# Altium PCB recall_ble_mod_v0_1.PcbDoc
Units mil, origin at the board's own origin, x right, y up, seen from the top; angles counter-clockwise.
Board outline 1166 x 940 mil, 2 copper layers (Component Side, Bottom Layer), stack 12.8 mil thick; 15 components, 13 nets, 89 pads, 5 vias.
Unrouted connection lines stored in the file: 1.
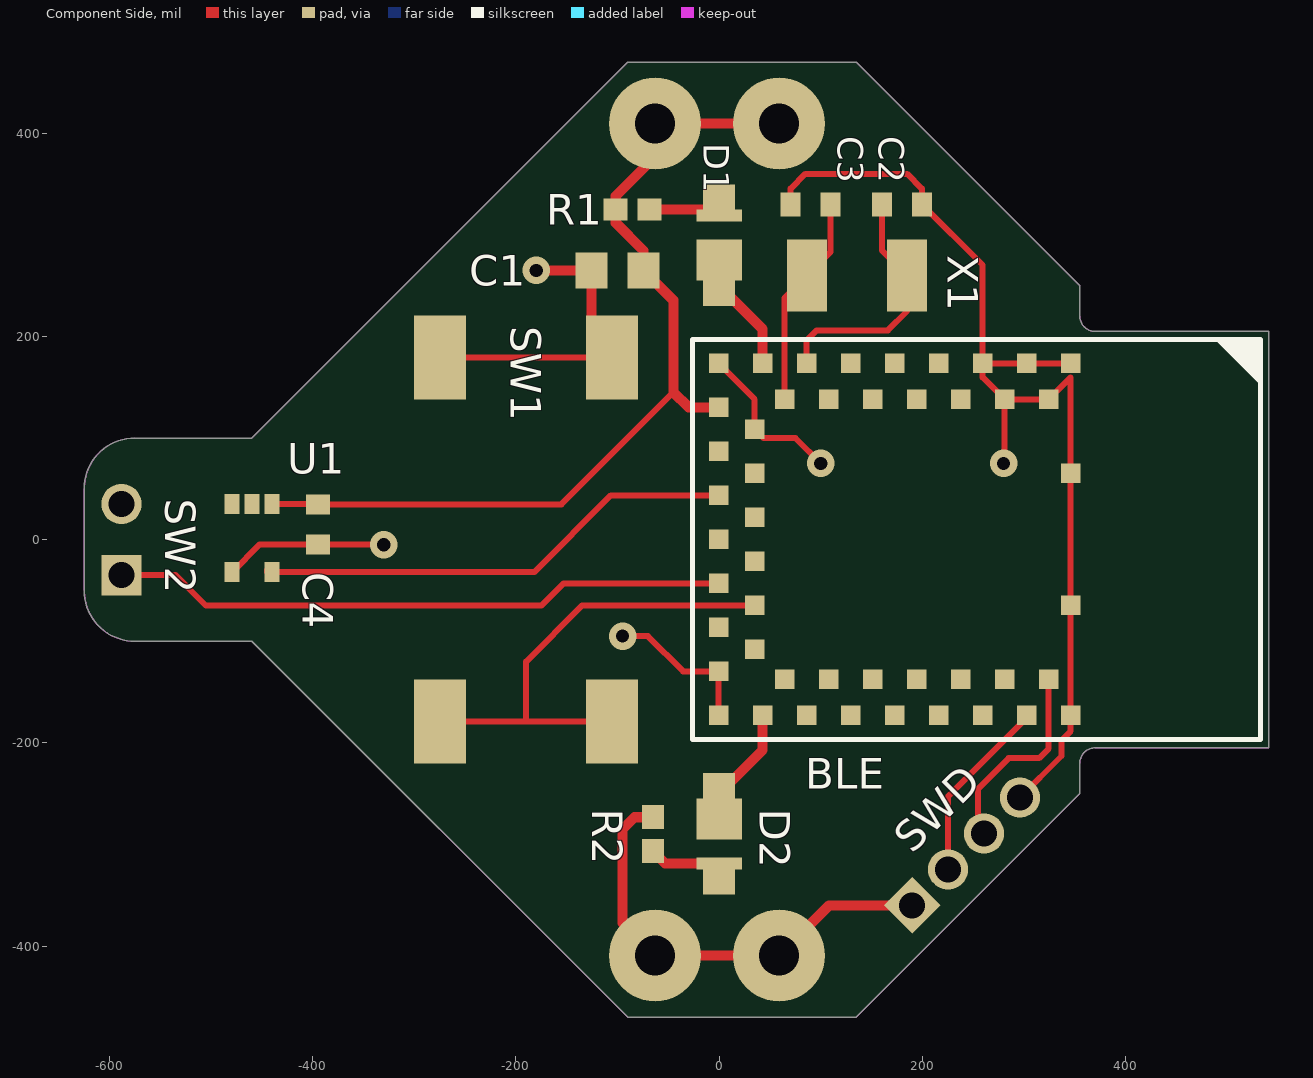
[diagram p0: Component Side view]
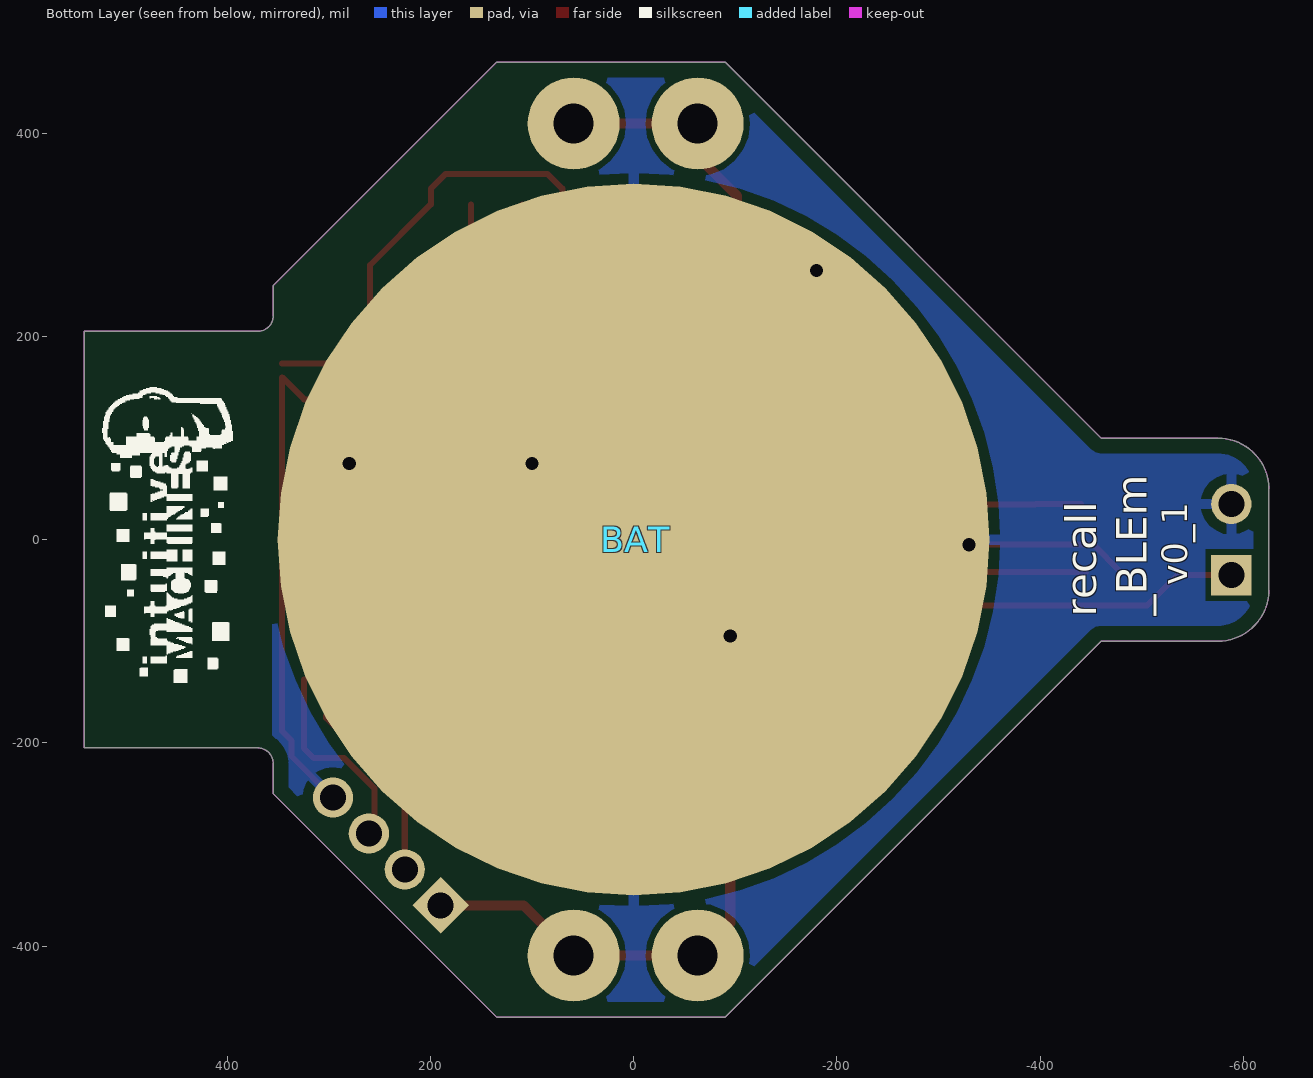
[diagram p1: Bottom Layer view, seen from below]
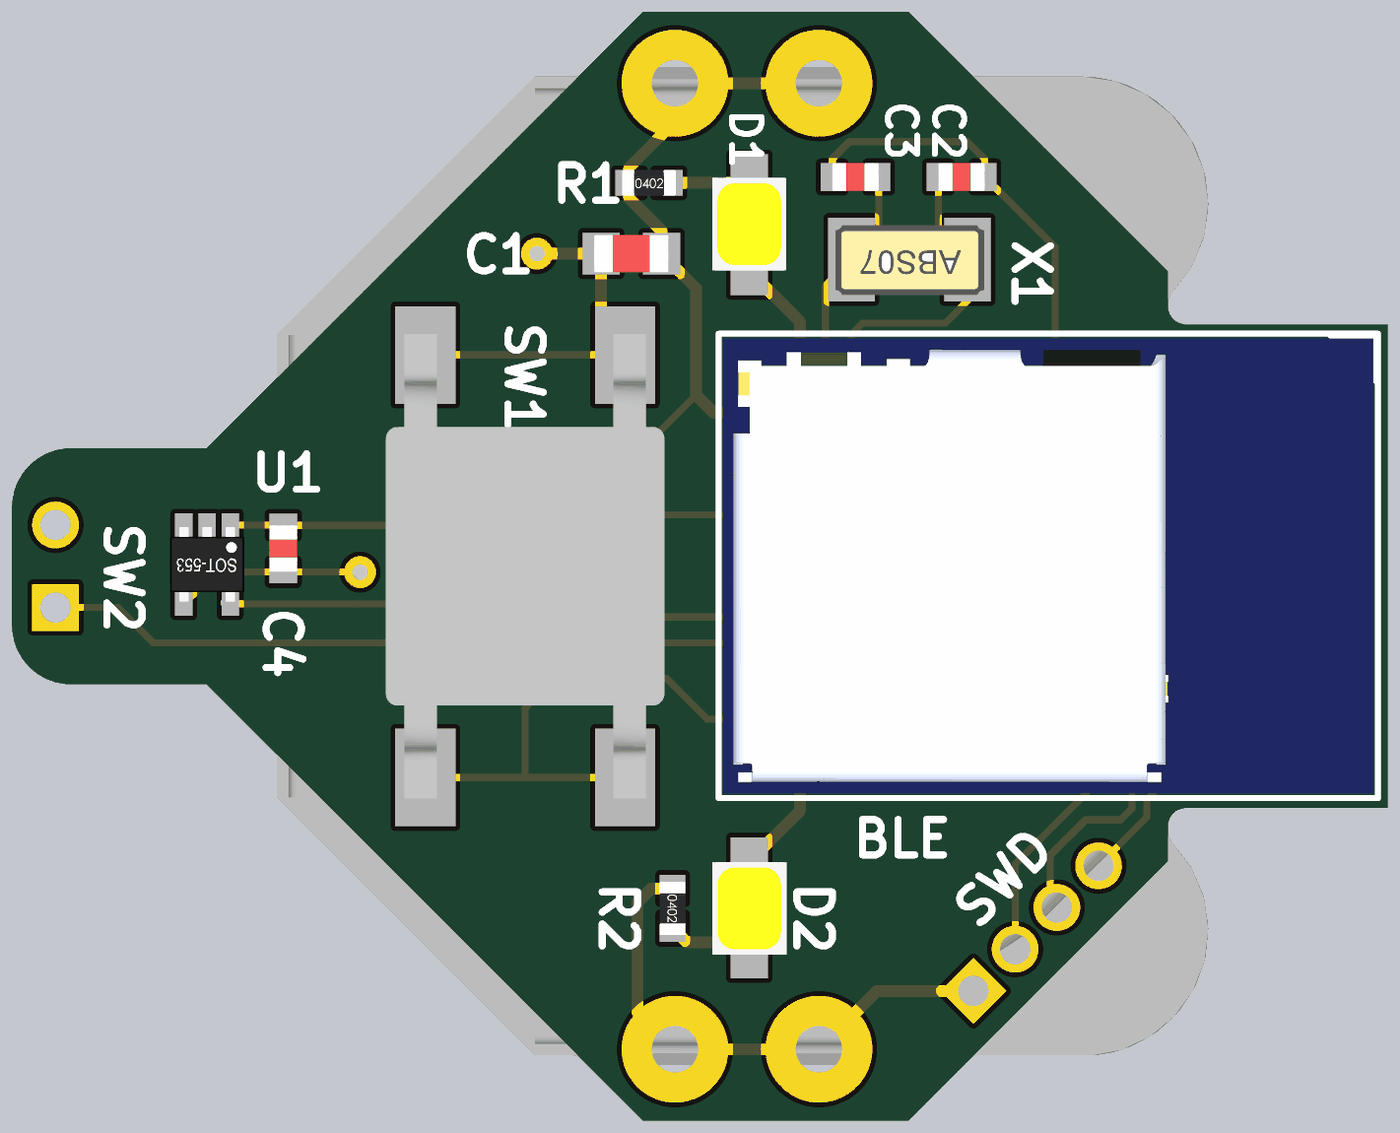
[diagram p2: 3D render of the assembled board from above, using the file's embedded part models]

## Layer stack, top to bottom
Top Solder: solder mask 0.4, Solder Resist, Dk 3.5
Component Side: signal copper 1.4
Dielectric 1: core 10, FR-4, Dk 4.2
Bottom Layer: signal copper 1.4
Solder Side: solder mask 0.4, Solder Resist, Dk 3.5

## Board outline
-575,-100 cw(c-575,-50) -625,-50 -625,50 cw(c-575,50) -575,100 -460,100 -90,470 135,470 355,250 355,220 ccw(c370,220) 370,205 541,205 541,-205 370,-205 ccw(c370,-220) 355,-220 355,-250 135,-470 -90,-470 -460,-100

## Design rules (kind name [scope] priority, off if disabled: settings)
BoardOutlineClearance [All] p1: gap=15
Clearance [All] p1: gap=6
HoleSize [All] p1: absolutevalues=TRUE maxlimit=100 minlimit=13 maxpercent=80.000 minpercent=20.000
HoleToHoleClearance [All] p1: gap=6 allowstackedmicrovias=TRUE
MinimumAnnularRing [All] p1: minimumring=7
MinimumSolderMaskSliver [All] p1: minsoldermaskwidth=0
PolygonConnect [All] p1: connectstyle=Relief reliefconductorwidth=10 reliefentries=4 polygonreliefangle="90 Angle" airgapwidth=10
RoomDefinition recall_ble_mod_v0_1 [InComponentClass('recall_ble_mod_v0_1')] p1: confinementstyle=ConfineIn formatcopy=TRUE lockcomponents=FALSE outline -3105,-2070 3685,-2070 3685,2625 -3105,2625
RoutingVias [All] p1: holewidth=13 width=27 viastyle="Through Hole" minholewidth=13 minwidth=27 maxholewidth=28 maxwidth=50
SilkToSilkClearance [All] p1: silktosilkclearance=6
SilkToSolderMaskClearance [IsPad] p1: minsilkscreentomaskgap=6 clearancetoexposedcopper=TRUE
SolderMaskExpansion [All] p1: expansion=4
Width [All] p1: maxlimit=50 minlimit=6 preferedwidth=6
25 further rules are at their usual default settings.

## Components (designator, comment, footprint, x,y, rotation, side; value= is the part's Value field where it differs from the comment)
BAT "CR2032" BAT-HLD-001-THM 0,0 r90 bottom
BLE "BMD-300" BMD-300 35,-108 r180 top locked
C1 "CAP" CAP_0603R -100,265 r0 top
C2 "CAP" CAP_0402R 180,330 r180 top
C3 "CAP" CAP_0402R 90,330 r0 top
C4 "CAP" CAP_0402R -395,15 r90 top
D1 "MP2016" MP2016_centered 0,290 r90 top
D2 "MP2016" MP2016_centered 0,-290 r270 top
R1 "RES" RES_0402 -85,325 r0 top
R2 "RES" RES_0402 -65,-290 r270 top
SW1 "4-1437565-1" 4-1437565-1 -190,0 r180 top
SW2 "DDS001" DDS001 -588.15,-35 r90 top
SWD "Header 4" HDR1X4_SWD 190,-360 r45 top
U1 "AH1892" sot-553 -440,35 r180 top
X1 "ABS07" ABS07 185,260 r180 top

## Footprints (in the part's own frame and the unit in brackets; to place one, negate y for a bottom-side part, rotate by r counter-clockwise, add the part's x,y. Pads: shape width x height; smd on the part's side, far side on the other; paste and mask are expansions set on the pad)
4-1437565-1 [mm] "TE Tactile Switch, 6mm x 6mm x 4mm"
  rect 1.3x2.1 smd: 1(-2.15,4.55) 1(2.15,4.55) 2(-2.15,-4.55) 2(2.15,-4.55)
  body extent -3,-5 3,5, height 5.05
ABS07 [mm] "ABS07-32.768KHZ-T"
  rect 1x1.8 smd: 1(0,0) 2(2.5,0)
  body extent -0.36,-0.74 2.84,0.76, height 0.89
BAT-HLD-001-THM [mm] "Battery holder for CR2032"
  round 2.3 hole 1: 1(-10.4,-1.6) 1(-10.4,1.5) 1(10.4,-1.6) 1(10.4,1.5)
  round 17.8 smd: 2(0,0)
  body extent -10.74,-10.17 10.74,9.88, height 3.96
BMD-300 [mm] "BMD-300, LGA, 47pin ,1.1mm Pitch, 14mm x 9.8mm"
  rect 0.49x0.49 smd: 1(-7.9,-7.15) 2(-7.35,-6.25) 3(-6.8,-7.15) 4(-6.25,-6.25) 5(-5.7,-7.15) 6(-5.15,-6.25) 7(-4.6,-7.15) 8(-4.05,-6.25) 9(-3.5,-7.15) 10(-2.95,-6.25) 11(-2.4,-7.15) 12(-1.85,-6.25) 13(-1.3,-7.15) 14(-0.75,-6.25) 15(-0.2,-7.15) 16(0.9,-7.15) 17(0.9,-6.05) 18(0,-5.5) 19(0.9,-4.95) 20(0,-4.4) 21(0.9,-3.85) 22(0,-3.3) 23(0.9,-2.75) 24(0,-2.2) 25(0.9,-1.65) 26(0,-1.1) 27(0.9,-0.55) 28(0,0) 29(0.9,0.55) 30(0.9,1.65) 31(-0.2,1.65) 32(-0.75,0.75) 33(-1.3,1.65) 34(-1.85,0.75) 35(-2.4,1.65) 36(-2.95,0.75) 37(-3.5,1.65) 38(-4.05,0.75) 39(-4.6,1.65) 40(-5.15,0.75) 41(-5.7,1.65) 42(-6.25,0.75) 43(-6.8,1.65) 44(-7.35,0.75) 45(-7.9,1.65) 46(-7.9,-1.1) 47(-7.9,-4.4)
  Multi-Layer pour cut-out: -8.15,-7.65 -8.15,2.15 -12.55,2.15 -12.55,-7.65
  silkscreen extent -12.65,-7.75 1.55,2.25, body extent -12.55,-7.65 1.45,2.15, height 1.89
CAP_0402R [mm] "Capacitor 0402 reflow soldering"
  rect 0.5x0.6 smd: 1(-0.5,0) 2(0.5,0)
  body extent -0.5,-0.3 0.5,0.3, height 0.2
CAP_0603R [mm] "capacitor 0603 reflow soldering"
  rect 0.8x0.9 smd: 1(-0.65,0) 2(0.65,0)
  body extent -0.8,-0.4 0.8,0.4, height 0.3
DDS001 [mm] "Micro Mini Thru-hole Detect Switches"
  rect 1.006x1.006 hole 0.65: 1(0,0)
  round 1.006 hole 0.65: 2(1.778,0)
HDR1X4_SWD [mm] "Connector; Header; 1x4Position"
  rect 1.006x1.006 hole 0.65: 1(0,0)
  round 1.006 hole 0.65: 2(1.27,0) 3(2.54,0) 4(3.81,0)
MP2016_centered [mm] "Luminus XNOVA LED"
  rect 0.3x1.14 smd: A(0.731,0)
  rect 0.65x0.8 smd: A(1.181,0) C(-1.204,0)
  rect 1.02x1.14 smd: C(-0.379,0)
  body extent -1,-0.8 1,0.8, height 0.55
RES_0402 [mm]
  rect 0.6x0.55 smd: 1(-0.425,0) 2(0.425,0)
  body extent -0.58,-0.28 0.57,0.27, height 0.41
sot-553 [mm]
  rect 0.375x0.5 smd: 1(0,0) 2(0.5,0) 3(1,0) 4(1,1.7) 5(0,1.7)
  body extent -0.3,0.05 1.3,1.65, height 0.5

## Part data
BAT: library part Battery
BLE: library part BMD-300-A, "Bluetooth 4.2 LE Module, nRF52832, 512kB Flash, 64kB RAM"
C1 C2 C3 C4: "Capacitor"
D1 D2: "MP2016 White LED"
R1 R2: "Resistor"
SW1: library part SW-TACT, "Translucent Conductive Silicone Elastomer Switch"
SW2: library part SW-PB, "Translucent Conductive Silicone Elastomer Switch"
SWD: "Header, 4-Pin"
U1: "Hall effect switch"
X1: "ABS25"

## Via types
v1: diameter 27, hole 13, Component Side to Bottom Layer, 5 vias

## Nets (pads, with @x,y where several pads share a name; then routed paths per layer and width w, separated by ;. In a path a pad name is that pad's centre, name@x,y a point inside that pad or via, vN(x,y) a via of type N, cw(c..) or ccw(c..) an arc to the next point about the centre after c; other vN are vias at no path point)
D1_CTRLN: BLE.15 D1.C | length 91.2
  Component Side w10: D1.C@0,242.58 7.42,242.58 42.87,207.13 BLE.15
D2_CTRLN: BLE.31 D2.C | length 91.7
  Component Side w6: D2.C@0,-242.58 D2.C@7.42,-242.58
  Component Side w10: D2.C@7.42,-242.58 42.87,-207.13 BLE.31
GND: BAT.2 BLE.1 BLE.2 BLE.3 BLE.4 BLE.5 BLE.16 BLE.18 BLE.29 BLE.30 BLE.45 BLE.46 BLE.47 C1.1 C2.1 C3.1 C4.1 SW1.2 SW2.2 SWD.4 U1.4 | length 1844.2
  Component Side w6: U1.4 -452.13,-4.69 C4.1 -330.31,-4.69 v1(-330,-5) ; SW1.2@-274.65,179.13 SW1.2@-105.35,179.13 ; v1(-95,-95) -70,-95 -35.35,-129.65 BLE.29 BLE.30 ; BLE.16 35,138.06 BLE.18 43.54,100 75,100 v1(100,75) ; C3.1 70.31,345.31 85,360 185,360 199.69,345.31 C2.1 259.41,270.28 BLE.5 ; v1@281.06,76.06 BLE.4 ; SWD.4 337,-213 337,-197.54 346.02,-188.52 BLE.45 BLE.46 BLE.47 346.02,159.72 BLE.2 BLE.4 ; BLE.1 BLE.3 BLE.5 ; BLE.5 259.41,159.72 BLE.4
  Component Side w10: v1(-180,265) C1.1 -125.59,199.37 SW1.2@-105.35,179.13
  other v1: 280,75
MAG_OUTN: BLE.21 U1.5 | length 472.8
  Component Side w6: U1.5@-445,-31.93 U1.5@-445,-30 ; U1.5 -181.93,-31.93 -106.43,43.57 BLE.21
NetD1_A: D1.A R1.2 | length 70.9
  Component Side w10: R1.2 -6.24,325 D1.A@0,318.76
NetD2_A: D2.A R2.2 | length 70
  Component Side w10: R2.2 -52.97,-318.76 D2.A@0,-318.76
SW1N: BLE.26 SW1.1 | length 476.3
  Component Side w6: SW1.1@-274.65,-179.13 -190,-179.13 ; SW1.1@-105.35,-179.13 -190,-179.13 ; BLE.26 34.69,-65 -135,-65 -190,-120 -190,-179.13
SW2N: BLE.25 SW2.1 | length 609.2
  Component Side w6: SW2.1 -535,-35 -505,-65 -175,-65 -153.04,-43.04 BLE.25
SWDCLK: BLE.43 SWD.2 | length 183.7
  Component Side w6: SWD.2 225.36,-252.67 302.72,-175.31 BLE.43
SWDIO: BLE.44 SWD.3 | length 200.4
  Component Side w6: SWD.3 255,-283.58 255,-245 285,-215 315,-215 324.37,-205.63 BLE.44
VDD: BAT.1 BLE.17 C1.2 C4.2 R1.1 R2.1 SWD.1 U1.1 | length 1363.7
  Component Side w6: U1.1 -395.31,35 C4.2 -155.31,34.69 -45,145 -45,145.19
  Component Side w10: R2.1 -83.27,-273.27 -95,-285 -95,-377.44 -62.99,-409.45 59.06,-409.45 108.5,-360 SWD.1 ; BLE.17 -30,130.19 -45,145.19 -45,235.59 C1.2 -74.41,284.41 -101.73,311.73 R1.1 -101.73,338.27 -62.99,377.01 -62.99,409.45 BAT.1@59.06,409.45
XTAL1: BLE.13 C2.2 X1.1 | length 248.7
  Component Side w6: BLE.13 86.18,196.18 96,206 166,206 185,225 X1.1 160.31,284.69 C2.2
XTAL2: BLE.14 C3.2 X1.2 | length 210.6
  Component Side w6: BLE.14 64.53,237.95 X1.2 109.69,283.11 C3.2
pads on no net: BLE.6 BLE.7 BLE.8 BLE.9 BLE.10 BLE.11 BLE.12 BLE.19 BLE.20 BLE.22 BLE.23 BLE.24 BLE.27 BLE.28 BLE.32 BLE.33 BLE.34 BLE.35 BLE.36 BLE.37 BLE.38 BLE.39 BLE.40 BLE.41 BLE.42 U1.2 U1.3

## Polygon pours and split planes (outlines as drawn)
GND on Bottom Layer "Ground Plane" (solid, remove dead copper, pour order 6): -640,-100 -640,100 -460,100 -90,470 135,470 355,250 355,205 541,205 541,-204 356,-204 355,-205 355,-250 135,-470 -90,-470 -460,-100

## Keep-outs
Keep-Out Layer:
  lines w1: -625,-50 ccw(c-575,-50) -575,-100 -550,-100 -460,-100 -90,-470 135,-470 355,-250 355,-220 cw(c370,-220) 370,-205 420,-205 541,-205 541,205 370,205 cw(c370,220) 355,220 355,225 355,250 135,470 -90,470 -460,100 -555,100 -575,100 ccw(c-575,50) -625,50 -625,30 -625,-30 -625,-50

## Silkscreen, mask and mechanical layers (free items; w line width, h text height)
Bottom Overlay:
  drawing of 41 lines, arcs and shapes, not listed
  text "v0_1" at -545,-45 h25 r270
  text "_BLEm" at -505,-75 h30 r270
  text "recall" at -455,-76 h30 r270
Mechanical 11:
  circle w1: c0,0 r393.7